# EAGLE board Z80_Memory (EAGLE 5.10)
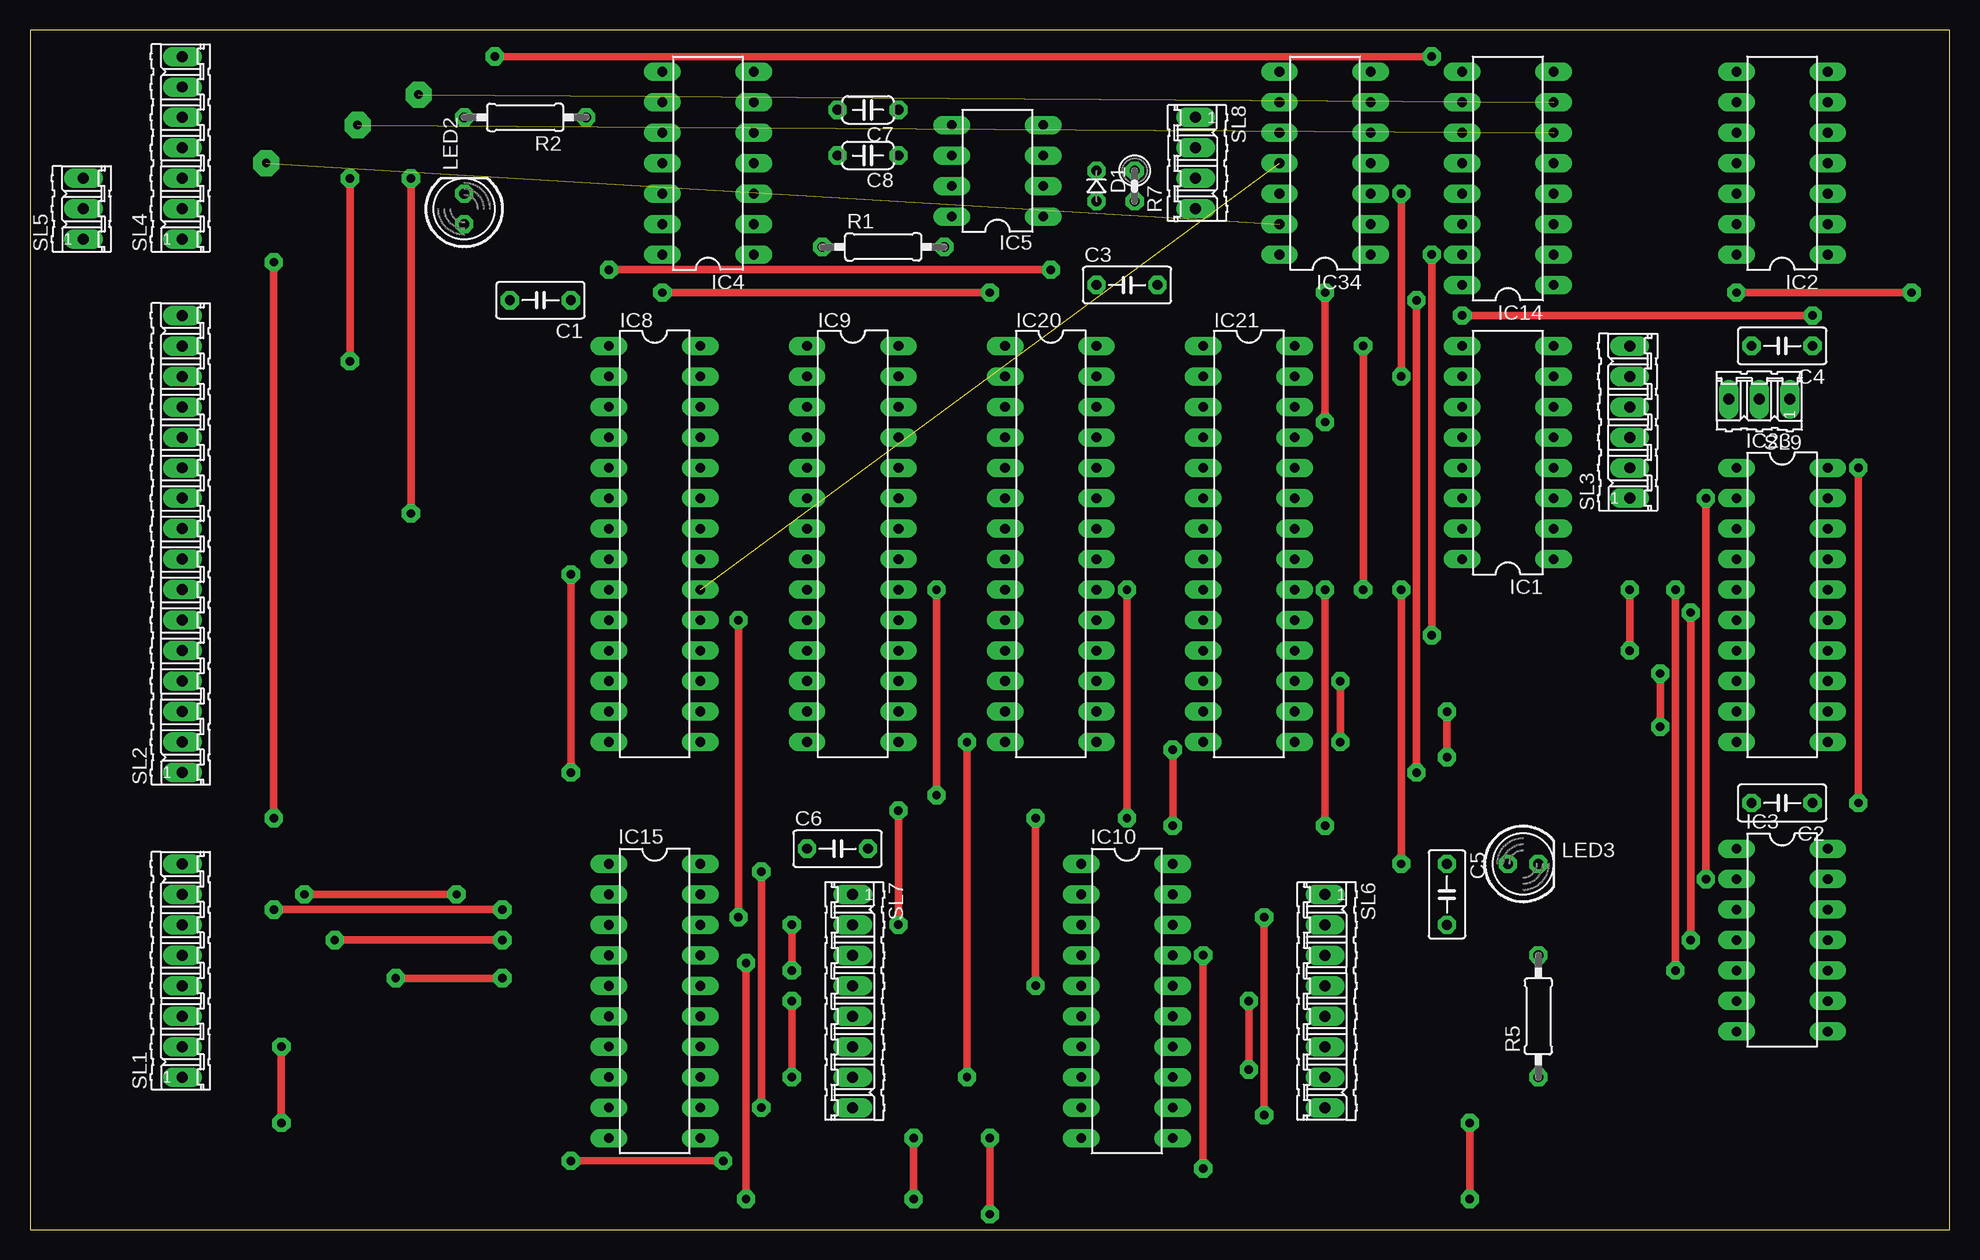
[diagram p0: board, top side]
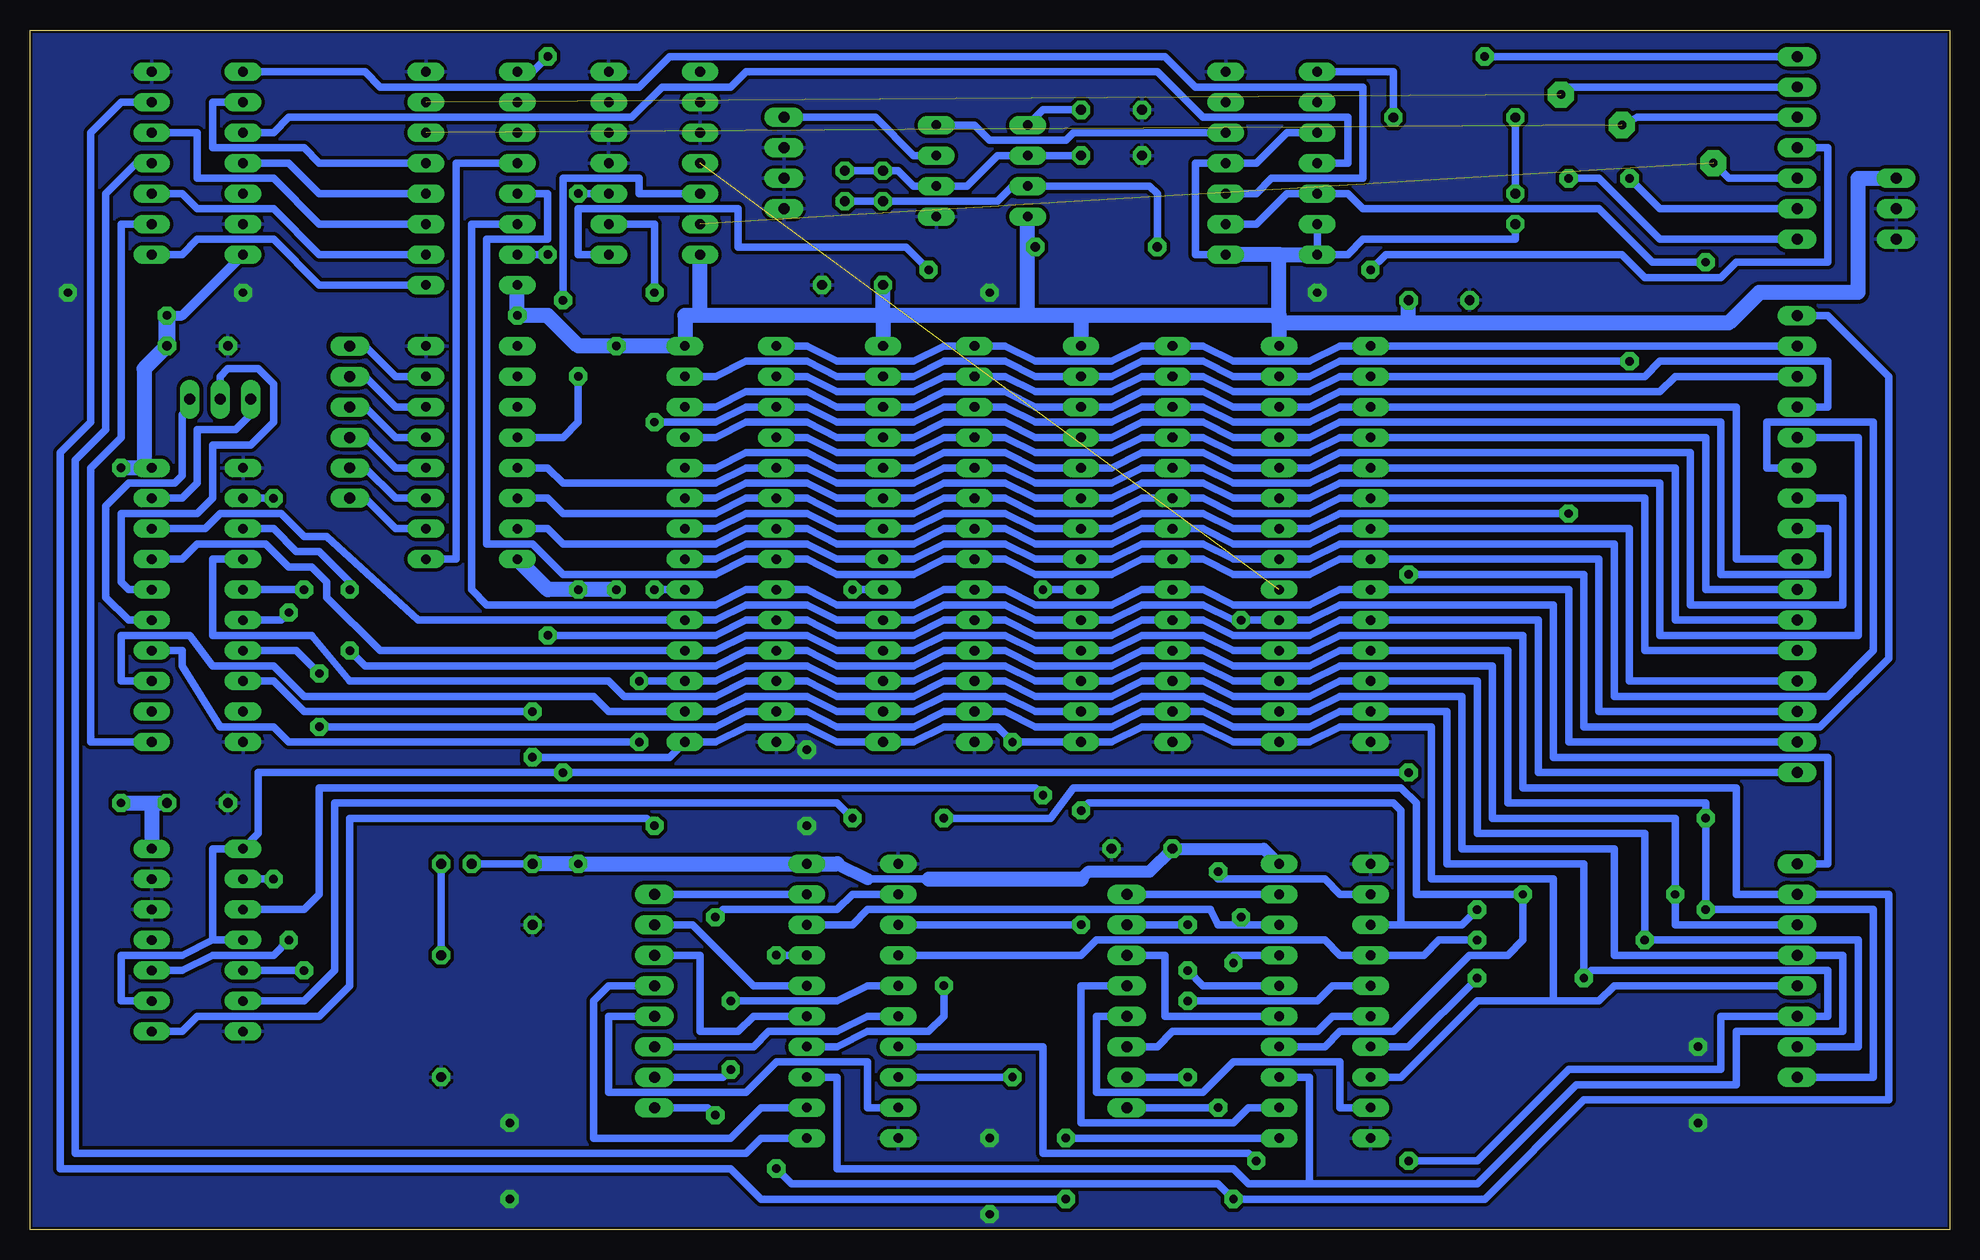
[diagram p1: board, bottom side, seen from below]

Size 160 x 100 mm. Coordinates in mm from the lower left corner, seen from the top.
Outline: 0,0 160,0 160,100 0,100 0,0
Copper layers (1*16): Top 0.035mm / dielectric 1.5mm / Bottom 0.035mm
Design rules "default *": minimum track width 16mil, minimum drill 24mil, track to track 12mil, track to pad 12mil, pad to pad 8mil, via to via 8mil, smd to smd 8mil, copper to edge 8mil, drill to drill 8mil, minimum pad ring 14mil, minimum via ring 16mil, stop-mask expansion 4mil, vias tented up to drill 0mil, thermal gap 10mil

## Footprints (pad centres in the part's own frame; a part is rotated, then mirrored left to right if it is on the bottom)
C050-030X075 = drill 0.813 octagon: 1 -2.54,0; 2 2.54,0
C050-024X044 = drill 0.813 octagon: 1 -2.54,0; 2 2.54,0
D-2.5 = drill 0.813 octagon: A 1.27,0; C -1.27,0
DIL16 = drill 0.813 long: 1 -8.89,-3.81; 2 -6.35,-3.81; 3 -3.81,-3.81; 4 -1.27,-3.81; 5 1.27,-3.81; 6 3.81,-3.81; 7 6.35,-3.81; 8 8.89,-3.81; 9 8.89,3.81; 10 6.35,3.81; 11 3.81,3.81; 12 1.27,3.81; 13 -1.27,3.81; 14 -3.81,3.81; 15 -6.35,3.81; 16 -8.89,3.81
DIL14 = drill 0.813 long: 1 -7.62,-3.81; 2 -5.08,-3.81; 3 -2.54,-3.81; 4 0,-3.81; 5 2.54,-3.81; 6 5.08,-3.81; 7 7.62,-3.81; 8 7.62,3.81; 9 5.08,3.81; 10 2.54,3.81; 11 0,3.81; 12 -2.54,3.81; 13 -5.08,3.81; 14 -7.62,3.81
DIL-08 = drill 0.813 long: 1 -3.81,-3.81; 2 -1.27,-3.81; 3 1.27,-3.81; 4 3.81,-3.81; 5 3.81,3.81; 6 1.27,3.81; 7 -1.27,3.81; 8 -3.81,3.81
DIL28-3 = drill 0.813 long: 1 -16.51,-3.81; 2 -13.97,-3.81; 3 -11.43,-3.81; 4 -8.89,-3.81; 5 -6.35,-3.81; 6 -3.81,-3.81; 7 -1.27,-3.81; 8 1.27,-3.81; 9 3.81,-3.81; 10 6.35,-3.81; 11 8.89,-3.81; 12 11.43,-3.81; 13 13.97,-3.81; 14 16.51,-3.81; 15 16.51,3.81; 16 13.97,3.81; 17 11.43,3.81; 18 8.89,3.81; 19 6.35,3.81; 20 3.81,3.81; 21 1.27,3.81; 22 -1.27,3.81; 23 -3.81,3.81; 24 -6.35,3.81; 25 -8.89,3.81; 26 -11.43,3.81; 27 -13.97,3.81; 28 -16.51,3.81
DIL20 = drill 0.813 long: 1 -11.43,-3.81; 2 -8.89,-3.81; 3 -6.35,-3.81; 4 -3.81,-3.81; 5 -1.27,-3.81; 6 1.27,-3.81; 7 3.81,-3.81; 8 6.35,-3.81; 9 8.89,-3.81; 10 11.43,-3.81; 11 11.43,3.81; 12 8.89,3.81; 13 6.35,3.81; 14 3.81,3.81; 15 1.27,3.81; 16 -1.27,3.81; 17 -3.81,3.81; 18 -6.35,3.81; 19 -8.89,3.81; 20 -11.43,3.81
LED5MM = drill 0.813 octagon: A -1.27,0; K 1.27,0
0207/10 = drill 0.813 octagon: 1 -5.08,0; 2 5.08,0
0207/2V = drill 0.813 octagon: 1 -1.27,0; 2 1.27,0
08P = drill 0.914 long: 1 -8.89,0; 2 -6.35,0; 3 -3.81,0; 4 -1.27,0; 5 1.27,0; 6 3.81,0; 7 6.35,0; 8 8.89,0
16P = drill 0.914 long: 1 -19.05,0; 2 -16.51,0; 3 -13.97,0; 4 -11.43,0; 5 -8.89,0; 6 -6.35,0; 7 -3.81,0; 8 -1.27,0; 9 1.27,0; 10 3.81,0; 11 6.35,0; 12 8.89,0; 13 11.43,0; 14 13.97,0; 15 16.51,0; 16 19.05,0
06P = drill 0.914 long: 1 -6.35,0; 2 -3.81,0; 3 -1.27,0; 4 1.27,0; 5 3.81,0; 6 6.35,0
07P = drill 0.914 long: 1 -7.62,0; 2 -5.08,0; 3 -2.54,0; 4 0,0; 5 2.54,0; 6 5.08,0; 7 7.62,0
03P = drill 0.914 long: 1 -2.54,0; 2 0,0; 3 2.54,0
04P = drill 0.914 long: 1 -3.81,0; 2 -1.27,0; 3 1.27,0; 4 3.81,0

## Placement (x,y rotation side)
C1  100n  [C050-030X075]  42.55,77.47 180 top
C2  100n  [C050-030X075]  146.05,35.56 180 top
C3  100n  [C050-030X075]  91.44,78.74 0 top
C4  100n  [C050-030X075]  146.05,73.66 180 top
C5  100n  [C050-030X075]  118.11,27.94 270 top
C6  100n  [C050-030X075]  67.31,31.75 0 top
C7  33n  [C050-024X044]  69.85,93.34 180 top
C8  33n  [C050-024X044]  69.85,89.53 180 top
D1  1N4148  [D-2.5]  88.9,87 270 top
IC1  74HC42  [DIL16]  123.19,64.77 90 top
IC2  74LS04N  [DIL14]  146.05,88.9 90 top
IC3  74AC00  [DIL14]  146.05,24.13 270 top
IC4  74LS74  [DIL14]  56.52,88.9 90 top
IC5  NE555  [DIL-08]  80.64,88.27 90 top
IC8  SRAM0  [DIL28-3]  52.07,57.15 270 top
IC9  SRAM1  [DIL28-3]  68.58,57.15 270 top
IC10  74LS374N  [DIL20]  91.44,19.05 270 top
IC14  74HC42  [DIL16]  123.19,87.63 90 top
IC15  74LS374N  [DIL20]  52.07,19.05 270 top
IC20  SRAM2  [DIL28-3]  85.09,57.15 270 top
IC21  SRAM3  [DIL28-3]  101.6,57.15 270 top
IC23  74LS374N  [DIL20]  146.05,52.07 270 top
IC34  74AC32  [DIL14]  107.95,88.9 90 top
LED2  port3  [LED5MM]  36.2,85.09 90 top
LED3  power  [LED5MM]  124.46,30.48 0 top
R1  22K  [0207/10]  71.12,81.92 0 top
R2  470  [0207/10]  41.27,92.71 180 top
R5  470  [0207/10]  125.73,17.78 90 top
R7  22K  [0207/2V]  92.08,87 270 top
SL1  data bus  [08P]  12.7,21.59 90 top
SL2  address bus  [16P]  12.7,57.15 90 top
SL3  port banks  [06P]  133.35,67.31 90 top
SL4  mem control bus  [07P]  12.7,90.17 90 top
SL5  power  [03P]  4.45,85.09 90 top
SL6  PORT1  [08P]  107.95,19.05 270 top
SL7  PORT2  [08P]  68.58,19.05 270 top
SL8  speaker  [04P]  97.16,88.9 270 top
SL9  memory ext  [03P]  144.15,69.22 180 top

## Library data of the parts
C1-C8 R1 R2 R5 R7 = rcl
D1 = diode
IC1 IC2 IC4 IC14 = 74xx-eu
IC3 IC10 IC15 IC23 IC34 = 74xx-us
IC5 = st-microelectronics
IC8 IC9 IC20 IC21 = memory-hitachi
LED2 LED3 = led
SL1-SL9 = con-amp-quick

## Nets
/CS_RAM0: IC8.20 IC34.11
/CS_RAM1: IC3.3 IC9.20
/CS_RAM2: IC3.6 IC20.20
/CS_RAM3: IC3.8 IC21.20
/EN_RAM0: IC34.13 SL4.3
/IOWR: IC34.1 SL4.4
/IOWR_BLOCK0: IC1.1 IC14.12
/IOWR_BLOCK1: IC1.2 SL3.1
/IOWR_BLOCK2: IC1.3 SL3.2
/IOWR_BLOCK3: IC1.4 SL3.3
/IOWR_BLOCK4: IC1.5 SL3.4
/IOWR_BLOCK5: IC1.6 SL3.5
/IOWR_BLOCK6: IC1.7 SL3.6
/MEMRD: IC8.22 IC9.22 IC20.22 IC21.22 SL4.1
/MEMWR: IC8.27 IC9.27 IC20.27 IC21.27 SL4.2
/WR_PORT0: IC2.1 IC14.1
/WR_PORT1: IC2.3 IC14.2
/WR_PORT2: IC2.5 IC14.3
/WR_PORT3: IC2.11 IC14.4
/WR_PORT4: IC2.9 IC14.5
/WR_PORT5: IC14.6 SL4.5
/WR_PORT6: IC14.7 SL4.6
/WR_PORT7: IC14.9 SL4.7
AB0: IC8.10 IC9.10 IC14.15 IC20.10 IC21.10 SL2.1
AB1: IC8.9 IC9.9 IC14.14 IC20.9 IC21.9 SL2.2
AB2: IC8.8 IC9.8 IC14.13 IC20.8 IC21.8 SL2.3
AB3: IC1.15 IC8.7 IC9.7 IC20.7 IC21.7 SL2.4
AB4: IC1.14 IC8.6 IC9.6 IC20.6 IC21.6 SL2.5
AB5: IC1.13 IC8.5 IC9.5 IC20.5 IC21.5 SL2.6
AB6: IC8.4 IC9.4 IC20.4 IC21.4 SL2.7
AB7: IC8.3 IC9.3 IC20.3 IC21.3 IC34.2 SL2.8
AB8: IC8.25 IC9.25 IC20.25 IC21.25 SL2.9
AB9: IC8.24 IC9.24 IC20.24 IC21.24 SL2.10
AB10: IC8.21 IC9.21 IC20.21 IC21.21 SL2.11
AB11: IC8.23 IC9.23 IC20.23 IC21.23 SL2.12
AB12: IC8.2 IC9.2 IC20.2 IC21.2 SL2.13
AB13: IC8.26 IC9.26 IC20.26 IC21.26 SL2.14
AB14: IC8.1 IC9.1 IC20.1 IC21.1 SL2.15
AB15: IC3.1 IC3.4 IC3.9 IC34.12 SL2.16
DB0: IC4.2 IC4.12 IC8.11 IC9.11 IC10.3 IC15.3 IC20.11 IC21.11 IC23.3 SL1.1
DB1: IC8.12 IC9.12 IC10.4 IC15.4 IC20.12 IC21.12 IC23.4 SL1.2
DB2: IC8.13 IC9.13 IC10.7 IC15.7 IC20.13 IC21.13 IC23.7 SL1.3
DB3: IC8.15 IC9.15 IC10.8 IC15.8 IC20.15 IC21.15 IC23.8 SL1.4
DB4: IC8.16 IC9.16 IC10.13 IC15.13 IC20.16 IC21.16 IC23.13 SL1.5
DB5: IC8.17 IC9.17 IC10.14 IC15.14 IC20.17 IC21.17 IC23.14 SL1.6
DB6: IC8.18 IC9.18 IC10.17 IC15.17 IC20.18 IC21.18 IC23.17 SL1.7
DB7: IC8.19 IC9.19 IC10.18 IC15.18 IC20.19 IC21.19 IC23.18 SL1.8
EN_RAM1: IC3.2 IC23.2
EN_RAM2: IC3.5 IC23.5
EN_RAM3: IC3.10 IC23.6
GND: C1.2 C2.2 C3.2 C4.2 C5.2 C6.2 C7.2 C8.2 IC1.8 IC2.7 IC2.13 IC3.7 IC3.12 IC3.13 IC4.7 IC5.1 IC8.14 IC9.14 IC10.1 IC10.10 IC14.8 IC15.1 IC15.10 IC20.14 IC21.14 IC23.1 IC23.10 IC34.4 IC34.5 IC34.7 IC34.9 IC34.10 R5.1 SL5.1 SL5.2 SL8.2 SL8.3 SL8.4
N$2: IC23.16 SL9.2
N$3: IC4.5 IC5.4
N$4: IC23.19 SL9.3
N$5: D1.A IC5.7 R1.1 R7.2
N$6: IC2.2 IC23.11
N$7: IC1.12 IC34.3
N$8: C8.1 D1.C IC5.2 IC5.6 R7.1
N$9: IC23.15 SL9.1
N$10: IC4.8 R2.1
N$11: IC5.3 SL8.1
N$12: C7.1 IC5.5
N$15: IC10.19 SL6.1
N$16: IC10.16 SL6.2
N$17: IC10.15 SL6.3
N$18: IC10.12 SL6.4
N$19: IC10.9 SL6.5
N$20: IC10.6 SL6.6
N$21: IC10.5 SL6.7
N$22: IC10.2 SL6.8
N$23: IC15.19 SL7.1
N$24: IC15.16 SL7.2
N$25: IC15.15 SL7.3
N$27: IC15.12 SL7.4
N$28: IC15.9 SL7.5
N$29: IC15.6 SL7.6
N$30: IC15.5 SL7.7
N$31: IC15.2 SL7.8
N$32: LED2.K R2.2
N$34: LED3.K R5.2
VCC: C1.1 C2.1 C3.1 C4.1 C5.1 C6.1 IC1.16 IC2.14 IC3.14 IC4.1 IC4.4 IC4.10 IC4.13 IC4.14 IC5.8 IC8.28 IC9.28 IC10.20 IC14.16 IC15.20 IC20.28 IC21.28 IC23.20 IC34.14 LED2.A LED3.A R1.2 SL5.3
WR_PORT1: IC2.4 IC10.11
WR_PORT2: IC2.6 IC15.11
WR_PORT3: IC2.10 IC4.11
WR_PORT4: IC2.8 IC4.3

## Tracks (layer width: path | path; a pad name or v marks a point on that pad's centre or on a via)
/CS_RAM0  (1 unrouted)
/CS_RAM1  (via drill 0.7)
  Top 0.61: v75.56,36.2 v75.56,53.34
  Bottom 0.61: v75.56,53.34 IC9.20 | IC3.3 137.16,26.67 135.89,27.94 135.89,36.83 76.2,36.83 v75.56,36.2
/CS_RAM2  (via drill 0.7)
  Top 0.61: v91.44,34.29 v91.44,53.34
  Bottom 0.61: v91.44,53.34 IC20.20 | IC3.6 137.16,19.05 134.62,21.59 134.62,35.56 92.71,35.56 v91.44,34.29
/CS_RAM3  (via drill 0.7)
  Top 0.61: v107.95,33.66 v107.95,53.34
  Bottom 0.61: v107.95,53.34 IC21.20 | v107.95,33.66 108.58,34.29 133.35,34.29 133.35,20.32 135.89,17.78 146.05,17.78 147.32,16.51 IC3.8
/EN_RAM0  (via drill 0.7 pad 2.18)  (1 unrouted)
  Bottom 0.61: SL4.3 18.41,87.63 v19.68,88.9
/IOWR  (via drill 0.7)
  Top 0.61: v48.26,80.01 v85.09,80.01
  Bottom 0.61: IC34.1 114.3,81.28 114.3,85.09 100.97,85.09 100.97,81.92 87,81.92 v85.09,80.01 | v48.26,80.01 46.99,81.28 27.3,81.28 25.4,79.38 19.05,79.38 17.78,80.64 10.16,80.64 10.16,90.17 SL4.4
/IOWR_BLOCK0
  Bottom 0.61: IC14.12 124.46,88.9 124.46,55.88 IC1.1
/IOWR_BLOCK1
  Bottom 0.61: IC1.2 129.54,58.42 132.08,60.96 SL3.1
/IOWR_BLOCK2
  Bottom 0.61: IC1.3 129.54,60.96 132.08,63.5 SL3.2
/IOWR_BLOCK3
  Bottom 0.61: IC1.4 129.54,63.5 132.08,66.04 SL3.3
/IOWR_BLOCK4
  Bottom 0.61: IC1.5 129.54,66.04 132.08,68.58 SL3.4
/IOWR_BLOCK5
  Bottom 0.61: IC1.6 129.54,68.58 132.08,71.12 SL3.5
/IOWR_BLOCK6
  Bottom 0.61: IC1.7 129.54,71.12 132.08,73.66 SL3.6
/MEMRD  (via drill 0.7)
  Top 0.61: v31.75,59.69 v31.75,87.63
  Bottom 0.61: IC21.22 102.87,58.42 100.33,59.69 95.25,59.69 92.71,58.42 IC20.22 86.36,58.42 83.82,59.69 78.74,59.69 76.2,58.42 IC9.22 69.85,58.42 67.31,59.69 62.23,59.69 59.69,58.42 IC8.22 53.34,58.42 50.8,59.69 v31.75,59.69 | v31.75,87.63 29.21,87.63 24.13,82.55 SL4.1
/MEMWR  (via drill 0.7)
  Top 0.61: v26.67,87.63 v26.67,72.39
  Bottom 0.61: IC21.27 102.87,71.12 100.33,72.39 95.25,72.39 92.71,71.12 IC20.27 86.36,71.12 83.82,72.39 78.74,72.39 76.2,71.12 IC9.27 69.85,71.12 67.31,72.39 62.23,72.39 59.69,71.12 IC8.27 53.34,71.12 50.8,72.39 v26.67,72.39 | SL4.2 24.13,85.09 v26.67,87.63
/WR_PORT0
  Bottom 0.61: IC14.1 135.89,78.74 139.7,82.55 146.05,82.55 147.32,81.28 IC2.1
/WR_PORT1
  Bottom 0.61: IC2.3 147.32,86.36 146.05,85.09 139.7,85.09 135.89,81.28 IC14.2
/WR_PORT2
  Bottom 0.61: IC14.3 135.89,83.82 139.7,87.63 146.05,87.63 146.05,91.44 IC2.5
/WR_PORT3
  Bottom 0.61: IC14.4 135.89,86.36 138.43,88.9 IC2.11
/WR_PORT4
  Bottom 0.61: IC14.5 135.89,88.9 137.16,90.17 144.78,90.17 144.78,93.98 IC2.9
/WR_PORT5  (via drill 0.7 pad 2.18)  (1 unrouted)
  Bottom 0.61: SL4.5 26.04,92.71 v27.3,92.08
/WR_PORT6  (via drill 0.7 pad 2.18)  (1 unrouted)
  Bottom 0.61: SL4.6 31.11,95.25 31.75,95.25 v32.38,94.61
/WR_PORT7  (via drill 0.7 pad 1.42)
  Top 0.61: v38.73,97.79 v116.84,97.79
  Bottom 0.61: v116.84,97.79 118.11,96.52 IC14.9 | SL4.7 v38.73,97.79
AB0  (via drill 0.7)
  Top 0.61: v116.84,49.53 116.84,74.93 v116.84,81.28
  Bottom 0.61: SL2.1 34.29,38.1 34.29,50.8 IC8.10 50.8,50.8 53.34,49.53 59.69,49.53 62.23,50.8 IC9.10 67.31,50.8 69.85,49.53 76.2,49.53 78.74,50.8 IC20.10 83.82,50.8 86.36,49.53 92.71,49.53 95.25,50.8 IC21.10 100.33,50.8 102.87,49.53 v116.84,49.53 | v116.84,81.28 IC14.15
AB1
  Bottom 0.61: SL2.2 31.75,40.64 31.75,53.34 IC8.9 50.8,53.34 53.34,52.07 59.69,52.07 62.23,53.34 IC9.9 67.31,53.34 69.85,52.07 76.2,52.07 78.74,53.34 IC20.9 83.82,53.34 86.36,52.07 92.71,52.07 95.25,53.34 IC21.9 100.33,53.34 102.87,52.07 121.92,52.07 123.19,53.34 123.19,83.82 IC14.14
AB2
  Bottom 0.61: SL2.3 29.21,43.18 29.21,55.88 IC8.8 50.8,55.88 53.34,54.61 59.69,54.61 62.23,55.88 IC9.8 67.31,55.88 69.85,54.61 76.2,54.61 78.74,55.88 IC20.8 83.82,55.88 86.36,54.61 92.71,54.61 95.25,55.88 IC21.8 100.33,55.88 102.87,54.61 115.57,54.61 118.11,57.15 121.92,57.15 121.92,82.55 116.84,82.55 116.84,86.36 IC14.13
AB3
  Bottom 0.61: IC1.15 116.84,58.42 115.57,57.15 102.87,57.15 100.33,58.42 IC21.7 95.25,58.42 92.71,57.15 86.36,57.15 83.82,58.42 IC20.7 78.74,58.42 76.2,57.15 69.85,57.15 67.31,58.42 IC9.7 62.23,58.42 59.69,57.15 53.34,57.15 50.8,58.42 IC8.7 26.67,58.42 26.67,45.72 SL2.4
AB4
  Bottom 0.61: IC1.14 116.84,60.96 115.57,59.69 102.87,59.69 100.33,60.96 IC21.6 95.25,60.96 92.71,59.69 86.36,59.69 83.82,60.96 IC20.6 78.74,60.96 76.2,59.69 69.85,59.69 67.31,60.96 IC9.6 62.23,60.96 59.69,59.69 53.34,59.69 50.8,60.96 IC8.6 25.4,60.96 25.4,48.26 SL2.5
AB5
  Bottom 0.61: IC1.13 116.84,63.5 115.57,62.23 102.87,62.23 100.33,63.5 IC21.5 95.25,63.5 92.71,62.23 86.36,62.23 83.82,63.5 IC20.5 78.74,63.5 76.2,62.23 69.85,62.23 67.31,63.5 IC9.5 62.23,63.5 59.69,62.23 53.34,62.23 50.8,63.5 IC8.5 22.86,63.5 22.86,50.8 SL2.6
AB6
  Bottom 0.61: IC21.4 95.25,66.04 92.71,64.77 86.36,64.77 83.82,66.04 IC20.4 78.74,66.04 76.2,64.77 69.85,64.77 67.31,66.04 IC9.4 62.23,66.04 59.69,64.77 53.34,64.77 50.8,66.04 IC8.4 20.32,66.04 20.32,53.34 SL2.7
AB7  (via drill 0.7)
  Top 0.61: v107.95,67.31 v107.95,78.11
  Bottom 0.61: SL2.8 17.78,55.88 17.78,68.58 IC8.3 50.8,68.58 53.34,67.31 59.69,67.31 62.23,68.58 IC9.3 67.31,68.58 69.85,67.31 76.2,67.31 78.74,68.58 IC20.3 83.82,68.58 86.36,67.31 92.71,67.31 95.25,68.58 IC21.3 100.33,68.58 102.87,67.31 v107.95,67.31 | IC34.2 107.95,83.82 v107.95,78.11
AB8
  Bottom 0.61: IC21.25 102.87,66.04 100.33,67.31 95.25,67.31 92.71,66.04 IC20.25 86.36,66.04 83.82,67.31 78.74,67.31 76.2,66.04 IC9.25 69.85,66.04 67.31,67.31 62.23,67.31 59.69,66.04 IC8.25 53.34,66.04 50.8,67.31 19.05,67.31 19.05,54.61 10.16,54.61 10.16,58.42 SL2.9
AB9
  Bottom 0.61: IC21.24 102.87,63.5 100.33,64.77 95.25,64.77 92.71,63.5 IC20.24 86.36,63.5 83.82,64.77 78.74,64.77 76.2,63.5 IC9.24 69.85,63.5 67.31,64.77 62.23,64.77 59.69,63.5 IC8.24 53.34,63.5 50.8,64.77 21.59,64.77 21.59,52.07 8.89,52.07 8.89,60.96 SL2.10
AB10
  Bottom 0.61: IC21.21 102.87,55.88 100.33,57.15 95.25,57.15 92.71,55.88 IC20.21 86.36,55.88 83.82,57.15 78.74,57.15 76.2,55.88 IC9.21 69.85,55.88 67.31,57.15 62.23,57.15 59.69,55.88 IC8.21 53.34,55.88 50.8,57.15 27.94,57.15 27.94,44.45 10.16,44.45 6.35,48.26 6.35,67.31 15.24,67.31 15.24,63.5 SL2.11
AB11
  Bottom 0.61: IC21.23 102.87,60.96 100.33,62.23 95.25,62.23 92.71,60.96 IC20.23 86.36,60.96 83.82,62.23 78.74,62.23 76.2,60.96 IC9.23 69.85,60.96 67.31,62.23 62.23,62.23 59.69,60.96 IC8.23 53.34,60.96 50.8,62.23 24.13,62.23 24.13,49.53 7.62,49.53 7.62,66.04 SL2.12
AB12
  Bottom 0.61: IC21.2 95.25,71.12 92.71,69.85 86.36,69.85 83.82,71.12 IC20.2 78.74,71.12 76.2,69.85 69.85,69.85 67.31,71.12 IC9.2 62.23,71.12 59.69,69.85 53.34,69.85 50.8,71.12 IC8.2 25.4,71.12 24.13,72.39 10.16,72.39 10.16,68.58 SL2.13
AB13
  Bottom 0.61: IC21.26 102.87,68.58 100.33,69.85 95.25,69.85 92.71,68.58 IC20.26 86.36,68.58 83.82,69.85 78.74,69.85 76.2,68.58 IC9.26 69.85,68.58 67.31,69.85 62.23,69.85 59.69,68.58 IC8.26 53.34,68.58 50.8,69.85 24.13,69.85 22.86,71.12 SL2.14
AB14
  Bottom 0.61: IC21.1 95.25,73.66 92.71,72.39 86.36,72.39 83.82,73.66 IC20.1 78.74,73.66 76.2,72.39 69.85,72.39 67.31,73.66 IC9.1 62.23,73.66 59.69,72.39 53.34,72.39 50.8,73.66 IC8.1 SL2.15
AB15  (via drill 0.7)
  Top 0.61: v45.09,54.61 v45.09,38.1 | v115.57,38.1 v115.57,77.47
  Bottom 0.61: v45.09,54.61 30.48,54.61 30.48,41.91 10.79,41.91 5.08,47.62 5.08,71.12 10.16,76.2 SL2.16 | v45.09,38.1 v115.57,38.1 140.97,38.1 140.97,33.02 IC3.1 144.78,31.75 144.78,24.13 | 144.78,24.13 IC3.4 | 144.78,24.13 147.32,22.86 152.4,22.86 152.4,19.05 IC3.9 | v115.57,77.47 115.57,87.63 109.22,87.63 109.22,86.36 IC34.12
DB0  (via drill 0.7)
  Top 0.61: v133.35,48.26 v133.35,53.34 | v20.32,26.67 v39.37,26.67 | v72.39,34.92 v72.39,25.4 | v20.32,34.29 v20.32,80.64
  Bottom 0.61: v133.35,53.34 133.35,53.98 135.89,56.52 137.79,56.52 139.7,58.42 IC23.3 | v133.35,48.26 132.08,46.99 102.87,46.99 100.33,48.26 IC21.11 95.25,48.26 92.71,46.99 86.36,46.99 83.82,48.26 IC20.11 78.74,48.26 76.2,46.99 69.85,46.99 67.31,48.26 IC9.11 62.23,48.26 59.69,46.99 53.34,46.99 50.8,48.26 IC8.11 36.83,48.26 36.83,35.56 20.32,35.56 v20.32,34.29 v20.32,26.67 6.35,26.67 6.35,12.7 SL1.1 | 45.72,25.4 40.64,25.4 v39.37,26.67 | 45.72,25.4 IC15.3 | v72.39,25.4 IC10.3 | v72.39,34.92 71.75,35.56 46.35,35.56 45.72,34.92 45.72,25.4 | v20.32,80.64 24.77,80.64 29.21,85.09 48.9,85.09 50.16,86.36 IC4.12 55.24,86.36 57.78,83.82 IC4.2
DB1  (via drill 0.7)
  Top 0.61: v25.4,24.13 v39.37,24.13
  Bottom 0.61: IC23.4 144.78,55.88 144.78,49.53 136.53,49.53 133.35,45.72 111.76,45.72 110.49,44.45 102.87,44.45 100.33,45.72 IC21.12 95.25,45.72 92.71,44.45 86.36,44.45 83.82,45.72 IC20.12 78.74,45.72 76.2,44.45 69.85,44.45 67.31,45.72 IC9.12 62.23,45.72 59.69,44.45 53.34,44.45 50.8,45.72 IC8.12 39.37,45.72 39.37,33.02 25.4,33.02 v25.4,24.13 7.62,24.13 7.62,15.24 SL1.2 | v39.37,24.13 42.55,24.13 43.81,22.86 IC15.4 50.8,22.86 52.07,24.13 71.12,24.13 72.39,22.86 IC10.4
DB2  (via drill 0.7)
  Top 0.61: v30.48,20.95 v39.37,20.95 | v45.09,5.71 v57.78,5.71 | v135.89,41.91 v135.89,46.35
  Bottom 0.61: IC15.7 45.09,15.24 v39.37,20.95 | IC10.7 75.56,15.24 75.56,6.35 58.42,6.35 v57.78,5.71 | v45.09,5.71 39.37,5.71 31.75,13.34 19.05,13.34 19.05,17.78 SL1.3 10.16,17.78 10.16,21.59 29.84,21.59 v30.48,20.95 30.48,30.48 41.91,30.48 41.91,43.18 IC8.13 50.8,43.18 53.34,41.91 59.69,41.91 62.23,43.18 IC9.13 67.31,43.18 69.85,41.91 76.2,41.91 78.74,43.18 IC20.13 83.82,43.18 86.36,41.91 92.71,41.91 95.25,43.18 IC21.13 100.33,43.18 102.87,41.91 v135.89,41.91 | IC23.7 137.79,48.26 v135.89,46.35
DB3  (via drill 0.7)
  Top 0.61: v78.11,40.64 v78.11,12.7 | v118.11,39.37 v118.11,43.18
  Bottom 0.61: SL1.4 27.94,20.32 29.21,19.05 33.02,19.05 | 33.02,19.05 33.02,29.21 43.18,29.21 43.18,41.91 50.8,41.91 53.34,40.64 IC8.15 59.69,40.64 62.23,41.91 67.31,41.91 69.85,40.64 IC9.15 v78.11,40.64 79.38,41.91 83.82,41.91 86.36,40.64 IC20.15 92.71,40.64 95.25,41.91 100.33,41.91 102.87,40.64 IC21.15 106.68,39.37 v118.11,39.37 | IC15.8 45.72,12.7 39.37,19.05 33.02,19.05 | v78.11,12.7 IC10.8 | IC23.8 139.7,45.72 137.16,43.18 v118.11,43.18
DB4
  Bottom 0.61: IC15.13 53.34,12.7 53.34,3.81 | 53.34,3.81 58.42,3.81 59.69,5.08 92.71,5.08 92.71,12.7 IC10.13 | 53.34,3.81 39.37,3.81 31.11,12.06 17.78,12.06 17.78,16.51 8.89,16.51 8.89,22.86 SL1.5 27.94,22.86 27.94,31.75 40.64,31.75 40.64,44.45 50.8,44.45 53.34,43.18 IC8.16 59.69,43.18 62.23,44.45 67.31,44.45 69.85,43.18 IC9.16 76.2,43.18 78.74,44.45 83.82,44.45 86.36,43.18 IC20.16 92.71,43.18 95.25,44.45 100.33,44.45 102.87,43.18 IC21.16 111.76,43.18 113.03,44.45 137.16,44.45 139.7,46.99 144.78,46.99 146.69,49.53 152.4,49.53 152.4,45.72 IC23.13
DB5  (via drill 0.7)
  Top 0.61: v109.22,45.72 v109.22,40.64 | v22.86,27.94 v35.56,27.94 | v83.82,34.29 v83.82,20.32
  Bottom 0.61: v109.22,45.72 IC21.17 102.87,45.72 100.33,46.99 95.25,46.99 92.71,45.72 IC20.17 86.36,45.72 83.82,46.99 78.74,46.99 76.2,45.72 IC9.17 69.85,45.72 67.31,46.99 62.23,46.99 59.69,45.72 IC8.17 53.34,45.72 50.8,46.99 38.1,46.99 38.1,34.29 22.86,34.29 v22.86,27.94 22.86,25.4 SL1.6 | v109.22,40.64 138.43,40.64 139.7,41.91 144.15,41.91 147.32,46.99 147.32,48.26 IC23.14 | IC15.14 52.07,15.24 50.8,16.51 46.35,16.51 40.01,22.86 36.83,22.86 35.56,24.13 v35.56,27.94 44.45,27.94 44.45,35.56 45.72,36.83 73.03,36.83 74.93,34.29 v83.82,34.29 | IC10.14 92.71,15.24 90.17,16.51 85.09,16.51 83.82,17.78 v83.82,20.32
DB6  (via drill 0.7)
  Top 0.61: v59.69,2.54 v59.69,22.23 | v97.79,5.08 v97.79,22.86
  Bottom 0.61: v59.69,22.23 59.69,22.86 IC15.17 | v97.79,5.08 96.52,3.81 60.96,3.81 v59.69,2.54 38.73,2.54 30.48,10.79 5.08,10.79 5.08,27.94 SL1.7 17.78,27.94 17.78,36.83 35.56,36.83 35.56,49.53 50.8,49.53 53.34,48.26 IC8.18 59.69,48.26 62.23,49.53 67.31,49.53 69.85,48.26 IC9.18 76.2,48.26 78.74,49.53 83.82,49.53 86.36,48.26 IC20.18 92.71,48.26 95.25,49.53 100.33,49.53 102.87,48.26 IC21.18 130.81,48.26 135.25,52.7 135.25,53.98 136.53,55.24 138.43,55.24 140.34,57.15 146.05,57.15 147.32,55.88 IC23.17 | v97.79,22.86 IC10.17
DB7  (via drill 0.7)
  Top 0.61: v59.05,50.8 v59.05,26.04
  Bottom 0.61: SL1.8 10.16,30.48 10.16,39.37 33.02,39.37 33.02,52.07 50.8,52.07 53.34,50.8 IC8.19 v59.05,50.8 59.69,50.8 62.23,52.07 67.31,52.07 69.85,50.8 IC9.19 76.2,50.8 78.74,52.07 83.82,52.07 86.36,50.8 IC20.19 92.71,50.8 95.25,52.07 100.33,52.07 102.87,50.8 IC21.19 127.64,50.8 135.25,57.78 137.16,57.78 139.06,59.69 144.15,59.69 145.41,58.42 IC23.18 | 59.05,25.4 IC15.18 | v59.05,26.04 59.05,25.4 | 59.05,25.4 60.96,25.4 61.59,26.67 90.17,26.67 91.44,25.4 IC10.18
EN_RAM1  (via drill 0.7)
  Top 0.61: v139.7,29.21 v139.7,60.96
  Bottom 0.61: v139.7,60.96 IC23.2 | v139.7,29.21 IC3.2
EN_RAM2  (via drill 0.7)
  Top 0.61: v137.16,21.59 v137.16,53.34
  Bottom 0.61: v137.16,53.34 IC23.5 | v137.16,21.59 IC3.5
EN_RAM3  (via drill 0.7)
  Top 0.61: v138.43,24.13 v138.43,51.44
  Bottom 0.61: v138.43,51.44 139.06,50.8 IC23.6 | v138.43,24.13 139.7,22.86 144.78,22.86 147.32,21.59 IC3.10
GND  (via drill 0.7)
  Top 0.61: v95.25,33.66 v95.25,40.01 | v120.02,2.54 v120.02,8.89 | v52.7,78.11 v80.01,78.11 | v142.24,78.11 v156.84,78.11 | v20.95,8.89 v20.95,15.24 | v80.01,1.27 v80.01,7.62
  pour Bottom: 0,100.33 0,0 160.02,0 160.02,100.33
N$2
  Bottom 0.61: IC23.16 151.76,53.34 152.4,53.98 152.4,59.69 146.05,59.69 144.78,60.96 144.78,65.41 141.6,65.41 139.7,67.31 139.7,70.48 140.97,71.75 143.51,71.75 144.15,71.12 SL9.2
N$3
  Bottom 0.61: IC4.5 73.03,91.44 73.66,90.81 80.01,90.81 81.28,92.08 IC5.4
N$4
  Bottom 0.61: IC23.19 147.32,60.96 146.05,62.23 146.05,66.67 142.88,66.67 141.6,67.94 SL9.3
N$5
  Bottom 0.61: R1.1 66.04,86.36 66.67,87 IC5.7 78.11,87 79.38,85.72 D1.A R7.2
N$6
  Bottom 0.61: IC2.2 152.4,83.82 152.4,66.04 154.94,63.5 154.94,40.64 IC23.11
N$7  (via drill 0.7)
  Top 0.61: v114.3,71.12 v114.3,86.36
  Bottom 0.61: IC1.12 115.57,66.04 114.3,67.31 v114.3,71.12 | v114.3,86.36 IC34.3
N$8
  Bottom 0.61: C8.1 IC5.6 79.38,89.53 81.92,87 IC5.2 86.36,87 87.63,88.27 D1.C R7.1
N$9
  Bottom 0.61: SL9.1 146.69,68.58 147.32,67.94 147.32,62.87 147.96,62.23 151.76,62.23 153.67,60.33 153.67,52.7 151.76,50.8 IC23.15
N$10
  Bottom 0.61: R2.1 46.35,96.52 IC4.8
N$11
  Bottom 0.61: IC5.3 86.36,89.53 89.53,92.71 SL8.1
N$12
  Bottom 0.61: C7.1 75.56,93.34 IC5.5
N$15
  Bottom 0.61: IC10.19 SL6.1
N$16
  Bottom 0.61: SL6.2 104.78,25.4 99.69,20.32 IC10.16
N$17
  Bottom 0.61: SL6.3 104.14,22.86 104.14,16.51 100.97,16.51 99.69,17.78 IC10.15
N$18
  Bottom 0.61: SL6.4 111.76,20.32 113.03,19.05 113.03,7.62 101.6,7.62 99.06,10.16 IC10.12
N$19
  Bottom 0.61: IC10.9 90.17,10.16 90.17,13.97 97.79,13.97 100.33,11.43 111.76,11.43 111.76,17.78 SL6.5
N$20
  Bottom 0.61: SL6.6 99.69,15.24 98.42,16.51 92.71,16.51 90.17,17.78 IC10.6
N$21  (via drill 0.7)
  Top 0.61: v101.6,19.05 v101.6,13.34
  Bottom 0.61: v101.6,13.34 102.23,12.7 SL6.7 | v101.6,19.05 92.71,19.05 90.17,20.32 IC10.5
N$22  (via drill 0.7)
  Top 0.61: v102.87,9.53 v102.87,26.04
  Bottom 0.61: IC10.2 91.44,27.94 92.71,26.67 102.23,26.67 v102.87,26.04 | v102.87,9.53 103.5,10.16 SL6.8
N$23
  Bottom 0.61: IC15.19 SL7.1
N$24  (via drill 0.7)
  Top 0.61: v63.5,21.59 v63.5,25.4
  Bottom 0.61: IC15.16 62.23,20.32 v63.5,21.59 | v63.5,25.4 SL7.2
N$25
  Bottom 0.61: IC15.15 65.41,17.78 65.41,22.86 SL7.3
N$27
  Bottom 0.61: SL7.4 72.39,20.32 72.39,8.89 59.69,8.89 58.42,10.16 IC15.12
N$28
  Bottom 0.61: IC15.9 50.8,10.16 50.8,13.97 59.69,13.97 62.23,11.43 71.12,11.43 71.12,17.78 SL7.5
N$29
  Bottom 0.61: SL7.6 66.04,15.24 64.77,16.51 52.7,16.51 51.44,17.78 IC15.6
N$30  (via drill 0.7)
  Top 0.61: v63.5,19.05 v63.5,12.7
  Bottom 0.61: IC15.5 51.44,20.32 52.7,19.05 v63.5,19.05 | v63.5,12.7 SL7.7
N$31  (via drill 0.7)
  Top 0.61: v60.96,10.16 v60.96,29.84
  Bottom 0.61: IC15.2 50.8,27.94 52.07,29.21 60.96,29.21 v60.96,29.84 | v60.96,10.16 SL7.8
N$32
  Bottom 0.61: LED2.K R2.2
N$34
  Bottom 0.61: R5.2 LED3.K
VCC  (via drill 0.7)
  Top 0.61: v111.12,73.66 v111.12,53.34 | v119.38,76.2 v148.59,76.2 | v152.4,63.5 v152.4,35.56 | v114.3,53.34 v114.3,30.48
  Bottom 0.61: 90.17,29.21 85.09,29.21 | IC4.13 IC4.14 50.16,81.28 48.9,82.55 36.2,82.55 LED2.A | IC4.1 62.87,81.28 62.87,88.9 IC4.4 57.78,88.9 55.24,91.44 IC4.10 | C5.1 LED3.A
  Bottom 0.813: IC2.14 147.32,76.2 v148.59,76.2
  Bottom 1.016: 72.39,29.21 71.75,29.84 66.67,29.84 C6.1 57.15,31.75 IC15.20 | 92.71,30.48 90.17,29.21
  Bottom 1.27: IC1.16 116.84,53.34 v114.3,53.34 v111.12,53.34 | IC14.16 v119.38,76.2 116.84,76.2 114.3,73.66 v111.12,73.66 IC21.28 105.41,76.2 104.14,76.2 | 88.9,76.2 104.14,76.2 | 88.9,76.2 IC20.28 | 88.9,76.2 C3.1 | 72.39,76.2 IC9.28 | 72.39,76.2 76.83,76.2 | 76.83,76.2 88.9,76.2 | 55.88,75.56 55.88,76.2 | 55.88,75.56 IC8.28 | 55.88,76.2 72.39,76.2 | C4.1 150.5,71.75 150.5,63.5 IC23.20 v152.4,63.5 | v152.4,35.56 149.86,35.56 | 149.86,35.56 C2.1 | 149.86,35.56 IC3.14 | 104.14,76.2 IC34.14 | 92.71,30.48 IC10.20 v114.3,30.48 C5.1 | 85.09,29.21 72.39,29.21 | 55.88,81.28 IC4.14 | 55.88,81.28 IC4.1 | 45.09,75.56 18.41,75.56 15.88,78.11 7.62,78.11 7.62,87.63 SL5.3 | 45.09,75.56 55.88,75.56 | 55.88,76.2 55.88,81.28 | 45.09,75.56 C1.1 | 76.83,76.2 76.83,81.92 | 76.83,81.92 IC5.8 | 76.83,81.92 R1.2
  Bottom 1.422: v148.59,76.2 C4.1
WR_PORT1
  Bottom 0.61: IC2.4 151.13,88.9 153.67,86.36 153.67,66.67 156.21,64.14 156.21,6.35 100.33,6.35 99.06,7.62 IC10.11
WR_PORT2  (via drill 0.7)
  Top 0.61: v73.66,7.62 v73.66,2.54
  Bottom 0.61: IC2.6 152.4,93.98 154.94,91.44 154.94,67.31 157.48,64.77 157.48,5.08 101.6,5.08 99.06,2.54 v73.66,2.54 | IC15.11 v73.66,7.62
WR_PORT3
  Bottom 0.61: IC4.11 50.16,88.9 50.16,92.71 62.23,92.71 66.04,96.52 100.33,96.52 101.6,95.25 107.31,95.25 109.86,92.71 138.43,92.71 139.7,91.44 IC2.10
WR_PORT4
  Bottom 0.61: IC2.8 132.08,96.52 130.81,95.25 109.22,95.25 106.68,97.79 65.41,97.79 62.87,95.25 48.9,95.25 48.9,87.63 56.52,87.63 57.78,86.36 IC4.3